# Altium PCB Adaptor_Board.PcbDoc
Units mm, origin at the board's own origin, x right, y up, seen from the top; angles counter-clockwise.
Board outline 22 x 30 mm, 4 copper layers (Top Layer, Layer 1, Layer 2, Bottom Layer), stack 0.761 mm thick; 2 components, 21 nets, 134 pads, 41 vias.
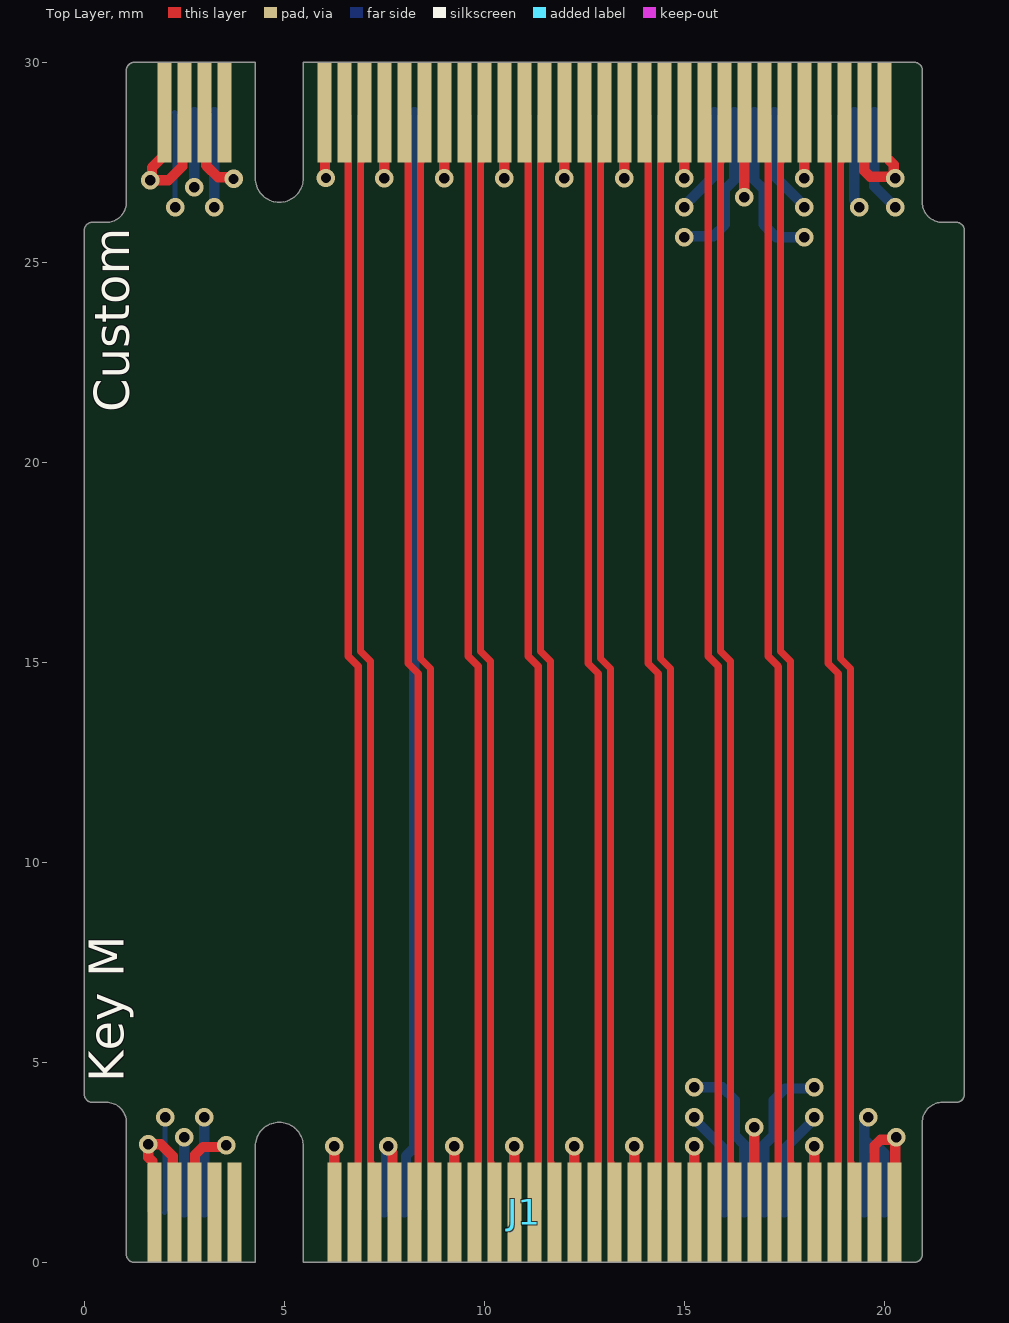
[diagram p0: Top Layer view]
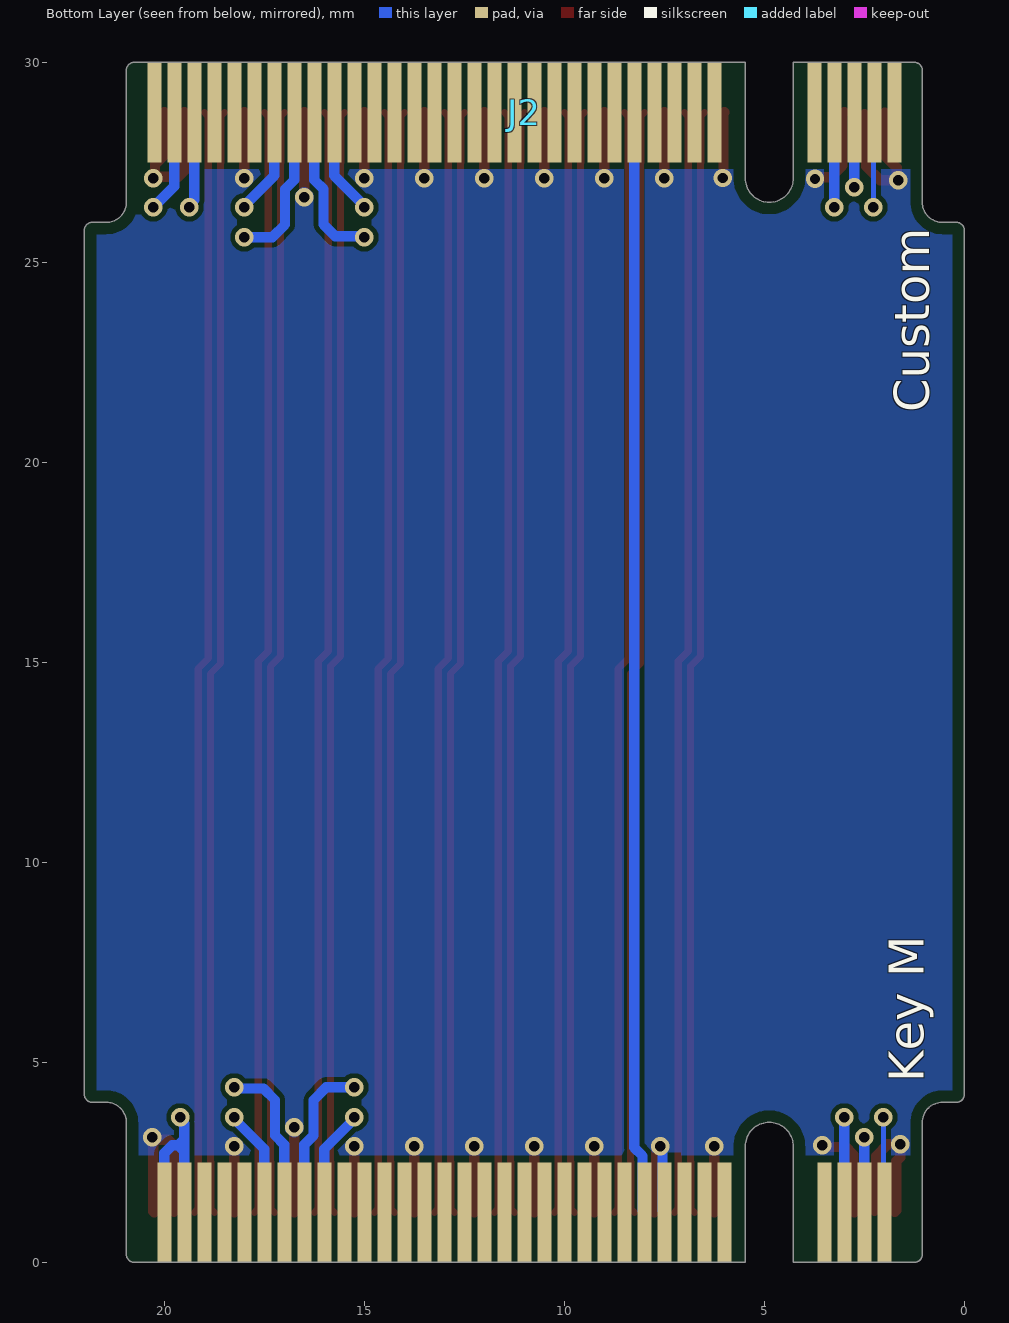
[diagram p1: Bottom Layer view, seen from below]
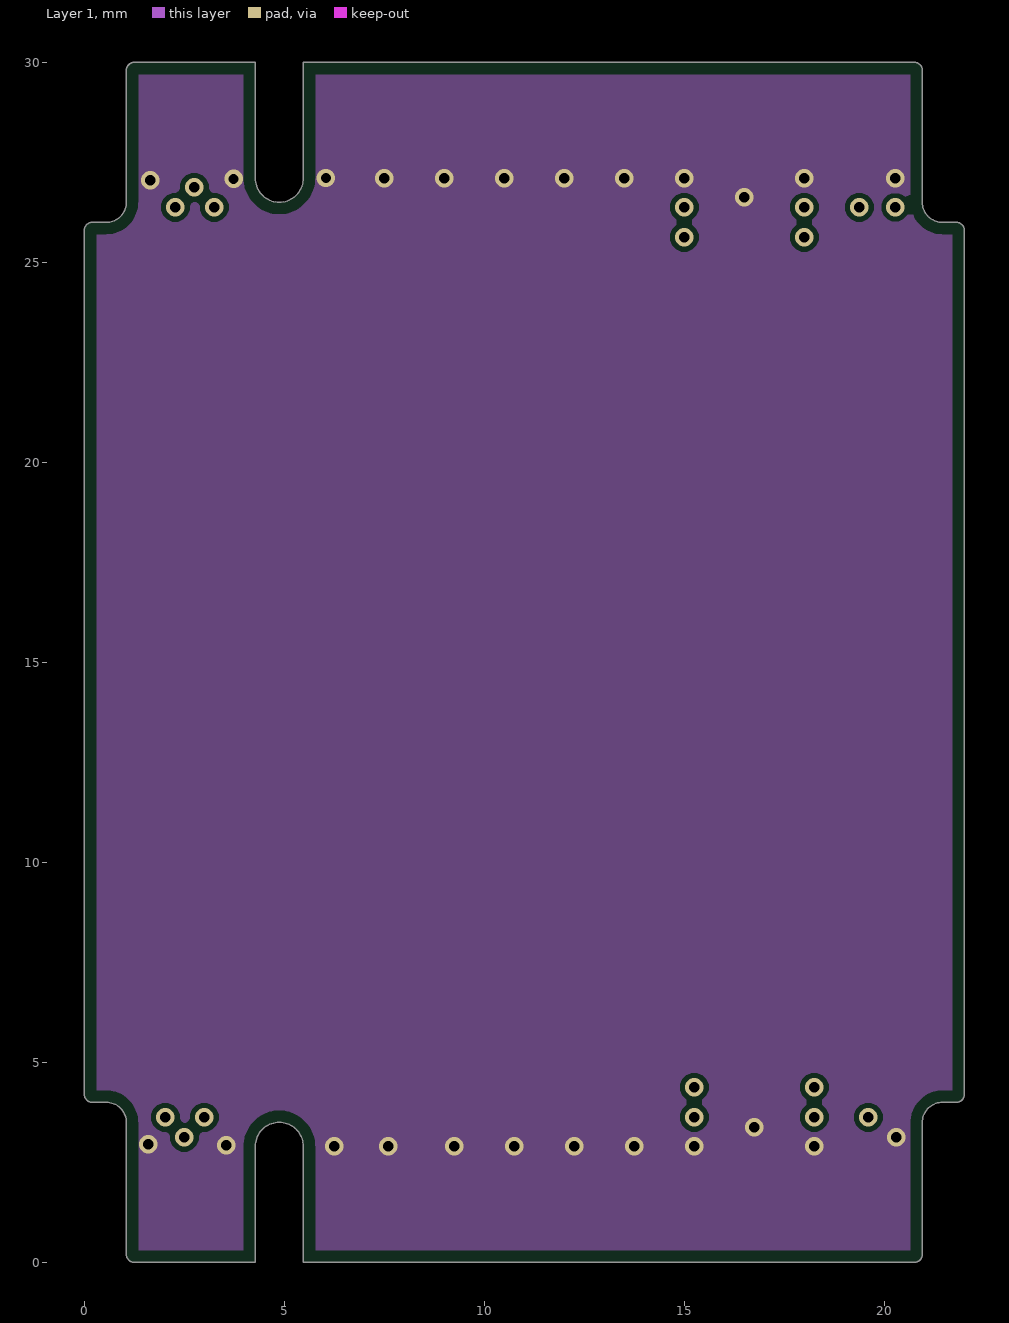
[diagram p2: Layer 1]
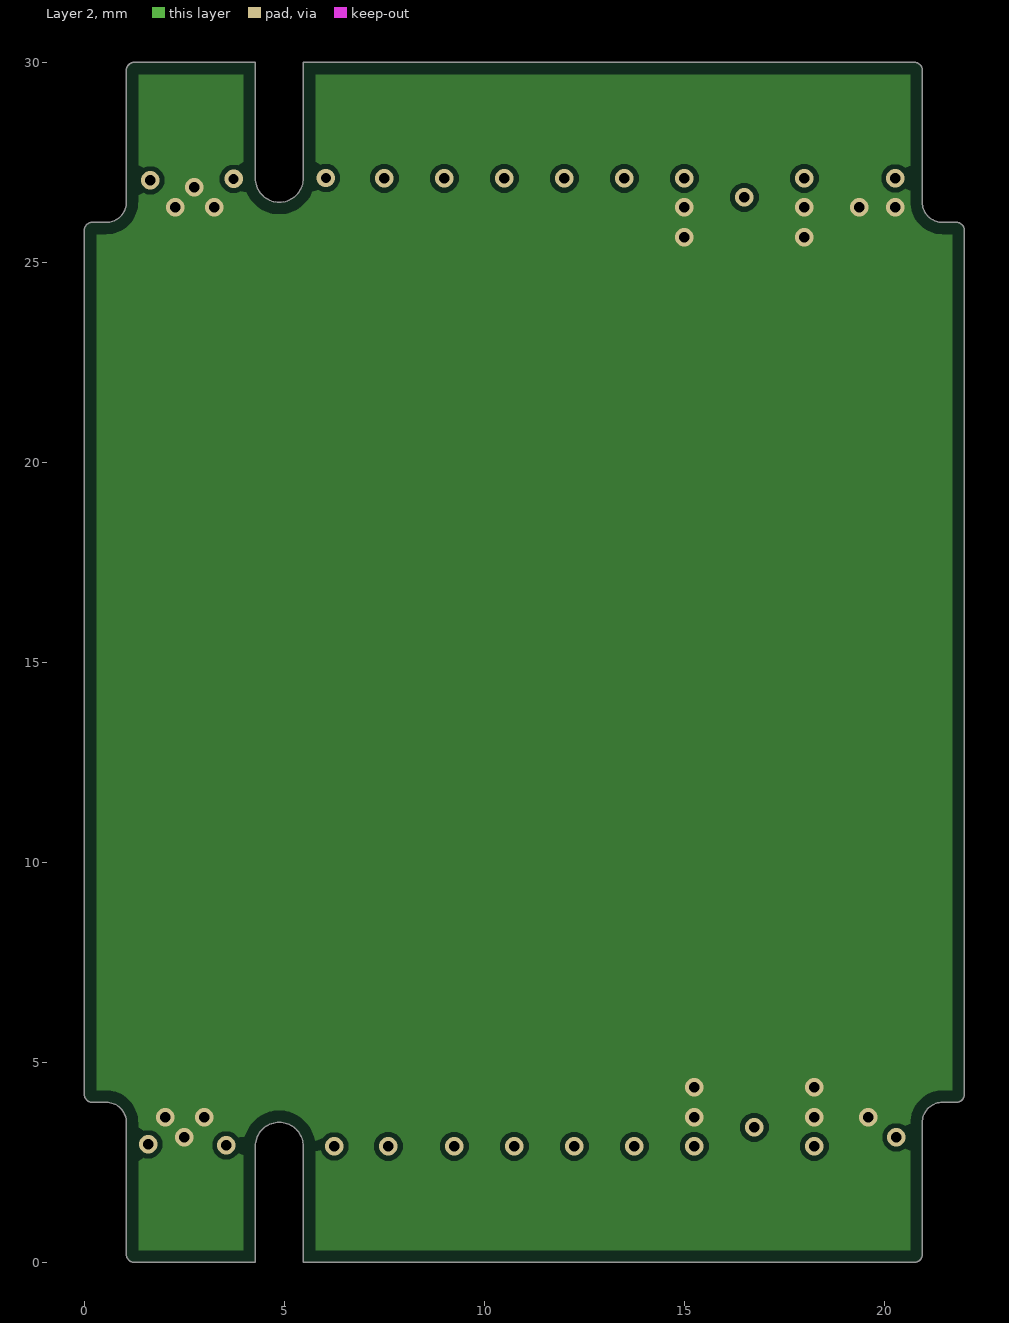
[diagram p3: Layer 2]

## Layer stack, top to bottom
Top Solder: solder mask 0.0102, Solder Resist, Dk 3.5
Top Layer: signal copper 0.0356
Dielectric 2: prepreg 0.11, PP-006, Dk 4.29
Layer 1: signal copper 0.035
Dielectric 1: dielectric 0.4, FR-4, Dk 4.8
Layer 2: signal copper 0.035
Dielectric 3: prepreg 0.11, PP-006, Dk 4.29
Bottom Layer: signal copper 0.0356
Bottom Solder: solder mask 0.0102, Solder Resist, Dk 3.5

## Board outline
0.2,4 0.55,4 cw(c0.55,3.5) 1.05,3.5 1.05,0.2 ccw(c1.25,0.2) 1.25,0 4.275,0 4.275,2.9 cw(c4.875,2.9) 4.875,3.5 cw(c4.875,2.9) 5.475,2.9 5.475,0 20.75,0 ccw(c20.75,0.2) 20.95,0.2 20.95,3.5 cw(c21.45,3.5) 21.45,4 21.8,4 ccw(c21.8,4.2) 22,4.2 22,25.8 ccw(c21.8,25.8) 21.8,26 21.45,26 cw(c21.45,26.5) 20.95,26.5 20.95,29.8 ccw(c20.75,29.8) 20.75,30 5.475,30 5.475,27.1 cw(c4.875,27.1) 4.875,26.5 cw(c4.875,27.1) 4.275,27.1 4.275,30 1.25,30 ccw(c1.25,29.8) 1.05,29.8 1.05,26.5 cw(c0.55,26.5) 0.55,26 0.2,26 ccw(c0.2,25.8) 0,25.8 0,4.2 ccw(c0.2,4.2)

## Design rules (kind name [scope] priority, off if disabled: settings)
BoardOutlineClearance [All] p1: gap=0.3 ignorepadtopadclearanceinfootprint=FALSE
Clearance Clearance_1 [All] p1: gap=0.127 ignorepadtopadclearanceinfootprint=FALSE
DiffPairsRouting [InDifferentialPairClass('PCIe')] p1: maxlimit=0.254 minlimit=0.127 mostfreqgap=0.254 toplayer_maxgap=0.127 toplayer_prefgap=0.127 toplayer_minwidth=0.176 toplayer_maxwidth=0.176 toplayer_prefwidth=0.176 bottomlayer_maxgap=0.127 bottomlayer_prefgap=0.127 bottomlayer_minwidth=0.176 bottomlayer_maxwidth=0.176 bottomlayer_prefwidth=0.176 impedanceprofiledriven=TRUE impedanceprofileid={55A645A5-C5B6-4A75-BB9C-9C2FC51129B0} impedanceprofilevalue=85.000000 maxuncoupledlength=12.7
HoleToHoleClearance [All] p1: gap=0.254 allowstackedmicrovias=FALSE
PlaneConnect [All] p1: planeconnectstyle=Direct reliefexpansion=0.508 reliefentries=4 reliefconductorwidth=0.254 reliefairgap=0.254
PolygonConnect [All] p1: thpad.connectstyle=Direct thpad.reliefconductorwidth=0.254 thpad.reliefentries=4 thpad.polygonreliefangle="90 Angle" thpad.airgapwidth=0.254 smdpad.connectstyle=Relief smdpad.reliefconductorwidth=0.254 smdpad.reliefentries=4 smdpad.polygonreliefangle="90 Angle" smdpad.airgapwidth=0.254 via.connectstyle=Direct via.reliefconductorwidth=0.254 via.reliefentries=4 via.polygonreliefangle="90 Angle" via.airgapwidth=0.254
RoutingVias [All] p1: holewidth=0.254 width=0.457 viastyle="Through Hole" minholewidth=0.254 minwidth=0.457 maxholewidth=0.254 maxwidth=0.457
SolderMaskExpansion [All] p1: expansion=0.102 istentingtop=FALSE
Width [All] p1: maxlimit=0.254 minlimit=0.127 preferedwidth=0.254
27 further rules are at their usual default settings.

## Classes and differential pairs
differential pair class PCIe: REFCLK RX0 RX1 RX2 RX3 TX0 TX1 TX2 TX3
differential pair TX3: +TX3_P -TX3_N
differential pair TX2: +TX2_P -TX2_N
differential pair TX1: +TX1_P -TX1_N
differential pair TX0: +TX0_P -TX0_N
differential pair RX3: +RX3_P -RX3_N
differential pair RX2: +RX2_P -RX2_N
differential pair RX1: +RX1_P -RX1_N
differential pair RX0: +RX0_P -RX0_N
differential pair REFCLK: +REFCLK_P -REFCLK_N

## Components (designator, comment, footprint, x,y, rotation, side; value= is the part's Value field where it differs from the comment)
J1 "M.2 Key M" "PCB EDGE M.2 Key M" 0,4.2 r0 top locked
J2 "M.2 Key M" "PCB EDGE M.2 Key M" 0,25.8 r0 bottom locked

## Footprints (in the part's own frame and the unit in brackets; to place one, negate y for a bottom-side part, rotate by r counter-clockwise, add the part's x,y. Pads: shape width x height; smd on the part's side, far side on the other; paste and mask are expansions set on the pad)
"PCB EDGE M.2 Key M" [mm]
  rect 0.35x2.5 smd mask+0.102: 1(20.25,-2.95) 3(19.75,-2.95) 5(19.25,-2.95) 7(18.75,-2.95) 9(18.25,-2.95) 11(17.75,-2.95) 13(17.25,-2.95) 15(16.75,-2.95) 17(16.25,-2.95) 19(15.75,-2.95) 21(15.25,-2.95) 23(14.75,-2.95) 25(14.25,-2.95) 27(13.75,-2.95) 29(13.25,-2.95) 31(12.75,-2.95) 33(12.25,-2.95) 35(11.75,-2.95) 37(11.25,-2.95) 39(10.75,-2.95) 41(10.25,-2.95) 43(9.75,-2.95) 45(9.25,-2.95) 47(8.75,-2.95) 49(8.25,-2.95) 51(7.75,-2.95) 53(7.25,-2.95) 55(6.75,-2.95) 57(6.25,-2.95) 67(3.75,-2.95) 69(3.25,-2.95) 71(2.75,-2.95) 73(2.25,-2.95) 75(1.75,-2.95)
  rect 0.35x2.5 smd far side mask+0.102: 2(20,-2.95) 4(19.5,-2.95) 6(19,-2.95) 8(18.5,-2.95) 10(18,-2.95) 12(17.5,-2.95) 14(17,-2.95) 16(16.5,-2.95) 18(16,-2.95) 20(15.5,-2.95) 22(15,-2.95) 24(14.5,-2.95) 26(14,-2.95) 28(13.5,-2.95) 30(13,-2.95) 32(12.5,-2.95) 34(12,-2.95) 36(11.5,-2.95) 38(11,-2.95) 40(10.5,-2.95) 42(10,-2.95) 44(9.5,-2.95) 46(9,-2.95) 48(8.5,-2.95) 50(8,-2.95) 52(7.5,-2.95) 54(7,-2.95) 56(6.5,-2.95) 58(6,-2.95) 68(3.5,-2.95) 70(3,-2.95) 72(2.5,-2.95) 74(2,-2.95)

## Via types
v1: diameter 0.457, hole 0.254, Top Layer to Bottom Layer, tented both sides, 41 vias

## Nets (pads, with @x,y where several pads share a name; then routed paths per layer and width w, separated by ;. In a path a pad name is that pad's centre, name@x,y a point inside that pad or via, vN(x,y) a via of type N, cw(c..) or ccw(c..) an arc to the next point about the centre after c; other vN are vias at no path point)
+3V3: J1.2 J1.4 J1.12 J1.14 J1.16 J1.18 J1.70 J1.72 J1.74 J2.3 J2.5 J2.13 J2.15 J2.17 J2.19 J2.69 J2.71 J2.73 | length 50.3
  Bottom Layer w0.127: J1.74 2.019,1.269 2.019,3.619 v1(2.025,3.625) ; J2.73 2.269,28.731 2.269,26.381 v1(2.275,26.375)
  Bottom Layer w0.254: J1.72 v1(2.5,3.125) ; v1(2.75,26.875) J2.71 ; J1.70 v1(3,3.625) ; v1(3.25,26.375) J2.69 ; v1(15,25.625) 15.027,25.652 15.727,25.652 16.017,25.943 16.017,26.825 16.25,27.057 J2.17 ; v1(15,26.375) 15,26.418 15.75,27.168 J2.19 ; v1(15.25,3.625) 15.25,3.582 16,2.832 J1.18 ; v1(15.25,4.375) 15.95,4.375 16.267,4.058 16.267,3.175 16.5,2.943 J1.16 ; J2.15 16.75,27.057 16.982,26.825 16.982,25.943 17.3,25.625 v1(18,25.625) ; J1.14 17,2.943 17.233,3.175 17.233,4.058 17.523,4.348 18.223,4.348 v1(18.25,4.375) ; J2.13 17.25,27.168 18,26.418 v1(18,26.375) ; J1.12 17.5,2.832 18.25,3.582 v1(18.25,3.625) ; J2.5 19.25,26.555 19.375,26.43 v1(19.375,26.375) ; J1.4 19.5,2.775 ; 19.5,3.198 19.5,3.075 ; v1(19.6,3.625) 19.6,3.57 19.5,3.47 19.5,3.075 ; J2.3 19.75,26.9 v1(20.275,26.375) ; J1.2 20,2.725 19.8,2.925 19.65,2.925 ; 19.5,2.775 19.5,2.925 ; 19.5,2.775 19.65,2.925 ; 19.5,2.925 19.5,3.075 ; 19.5,2.925 19.65,2.925 ; 19.5,3.075 19.65,2.925
GND: J1.1 J1.3 J1.9 J1.15 J1.21 J1.27 J1.33 J1.39 J1.45 J1.51 J1.52 J1.57 J1.71 J1.73 J1.75 J2.2 J2.4 J2.10 J2.16 J2.22 J2.28 J2.34 J2.40 J2.46 J2.52 J2.58 J2.70 J2.72 J2.74 | length 54.2
  Top Layer w0.254: v1(1.65,27.05) 2.105,27.05 2.452,27.396 2.452,28.671 J2.72@2.493,28.712 ; J1.75@1.737,1.262 1.702,1.298 1.702,2.525 1.6,2.627 v1(1.6,2.95) 1.912,2.95 2.21,2.652 2.21,1.321 J1.73@2.243,1.288 ; v1@1.744,27.05 1.689,27.105 1.689,27.364 1.987,27.662 J2.74@1.987,28.738 ; J1.71 2.768,1.268 2.768,2.687 2.967,2.886 3.511,2.886 v1(3.55,2.925) ; J2.70 3.048,28.702 3.048,27.418 3.341,27.125 3.694,27.125 v1(3.733,27.086) ; J2.58 6.019,28.731 6.019,27.126 v1(6.039,27.107) ; J1.57 v1(6.25,2.9) ; v1(7.5,27.1) J2.52 ; v1(7.6,2.9) 7.6,2.845 7.702,2.743 7.702,1.298 J1.51 ; v1(9,27.1) J2.46 ; J1.45 v1(9.25,2.9) ; v1(10.5,27.1) J2.40 ; J1.39 v1(10.75,2.9) ; v1(12,27.1) J2.34 ; J1.33 v1(12.25,2.9) ; v1(13.5,27.1) J2.28 ; J1.27 v1(13.75,2.9) ; v1(15,27.1) J2.22 ; J1.21 v1(15.25,2.9) ; v1(16.5,26.625) J2.16 ; J1.15 v1(16.75,3.375) ; v1(18,27.1) J2.10 ; J1.9 v1(18.25,2.9) ; J2.4 19.5,27.288 19.649,27.139 v1@20.236,27.139 ; J1.3@19.755,1.255 19.755,2.915 19.903,3.064 20.184,3.064 20.245,3.125 v1(20.3,3.125) 20.275,3.1 20.275,2.325 20.275,1.275 J1.1 J1.1@20.25,2.325 ; J2.2 20,27.675 20.236,27.439 v1@20.236,27.139 ; v1(20.275,27.1) v1@20.236,27.139
  Bottom Layer w0.254: J1.52 7.548,1.298 7.548,2.793 7.6,2.845 v1(7.6,2.9)
PERST#: J1.50 J2.49 | length 27.6
  Bottom Layer w0.254: J1.50 8.044,1.294 8.044,2.662 8.25,2.868 J2.49
REFCLK_N: J1.53 J2.54 | length 27.7
  Top Layer w0.176: J2.54 6.913,28.663 6.913,27.496 6.902,27.485 6.902,15.277 7.152,15.027 7.152,2.515 7.163,2.504 7.163,1.337 J1.53
REFCLK_P: J1.55 J2.56 | length 27.7
  Top Layer w0.176: J2.56 6.587,28.663 6.587,27.496 6.598,27.485 6.598,15.151 6.848,14.901 6.848,2.515 6.837,2.504 6.837,1.337 J1.55
RX0_N: J1.47 J2.48 | length 27.7
  Top Layer w0.176: J2.48 8.413,28.663 8.413,27.496 8.402,27.485 8.402,15.099 8.652,14.849 8.652,2.515 8.663,2.504 8.663,1.337 J1.47
RX0_P: J1.49 J2.50 | length 27.7
  Top Layer w0.176: J2.50 8.087,28.663 8.087,27.496 8.098,27.485 8.098,14.973 8.348,14.723 8.348,2.515 8.337,2.504 8.337,1.337 J1.49
RX1_N: J1.35 J2.36 | length 27.7
  Top Layer w0.176: J2.36 11.413,28.663 11.413,27.496 11.402,27.485 11.402,15.277 11.652,15.027 11.652,2.515 11.663,2.504 11.663,1.337 J1.35
RX1_P: J1.37 J2.38 | length 27.7
  Top Layer w0.176: J2.38 11.087,28.663 11.087,27.496 11.098,27.485 11.098,15.151 11.348,14.901 11.348,2.515 11.337,2.504 11.337,1.337 J1.37
RX2_N: J1.23 J2.24 | length 27.7
  Top Layer w0.176: J2.24 14.413,28.663 14.413,27.496 14.402,27.485 14.402,15.099 14.652,14.849 14.652,2.515 14.663,2.504 14.663,1.337 J1.23
RX2_P: J1.25 J2.26 | length 27.7
  Top Layer w0.176: J2.26 14.087,28.663 14.087,27.496 14.098,27.485 14.098,14.973 14.348,14.723 14.348,2.515 14.337,2.504 14.337,1.337 J1.25
RX3_N: J1.11 J2.12 | length 27.7
  Top Layer w0.176: J2.12 17.413,28.663 17.413,27.496 17.402,27.485 17.402,15.277 17.652,15.027 17.652,2.515 17.663,2.504 17.663,1.337 J1.11
RX3_P: J1.13 J2.14 | length 27.7
  Top Layer w0.176: J2.14 17.087,28.663 17.087,27.496 17.098,27.485 17.098,15.151 17.348,14.901 17.348,2.515 17.337,2.504 17.337,1.337 J1.13
TX0_N: J1.41 J2.42 | length 27.7
  Top Layer w0.176: J2.42 9.913,28.663 9.913,27.496 9.902,27.485 9.902,15.277 10.152,15.027 10.152,2.515 10.163,2.504 10.163,1.337 J1.41
TX0_P: J1.43 J2.44 | length 27.7
  Top Layer w0.176: J2.44 9.587,28.663 9.587,27.496 9.598,27.485 9.598,15.151 9.848,14.901 9.848,2.515 9.837,2.504 9.837,1.337 J1.43
TX1_N: J1.29 J2.30 | length 27.7
  Top Layer w0.176: J2.30 12.913,28.663 12.913,27.496 12.902,27.485 12.902,15.099 13.152,14.849 13.152,2.515 13.163,2.504 13.163,1.337 J1.29
TX1_P: J1.31 J2.32 | length 27.7
  Top Layer w0.176: J2.32 12.587,28.663 12.587,27.496 12.598,27.485 12.598,14.973 12.848,14.723 12.848,2.515 12.837,2.504 12.837,1.337 J1.31
TX2_N: J1.17 J2.18 | length 27.7
  Top Layer w0.176: J2.18 15.913,28.663 15.913,27.496 15.902,27.485 15.902,15.277 16.152,15.027 16.152,2.515 16.163,2.504 16.163,1.337 J1.17
TX2_P: J1.19 J2.20 | length 27.7
  Top Layer w0.176: J2.20 15.587,28.663 15.587,27.496 15.598,27.485 15.598,15.151 15.848,14.901 15.848,2.515 15.837,2.504 15.837,1.337 J1.19
TX3_N: J1.5 J2.6 | length 27.7
  Top Layer w0.176: J2.6 18.913,28.663 18.913,27.496 18.902,27.485 18.902,15.099 19.152,14.849 19.152,2.515 19.163,2.504 19.163,1.337 J1.5
TX3_P: J1.7 J2.8 | length 27.7
  Top Layer w0.176: J2.8 18.587,28.663 18.587,27.496 18.598,27.485 18.598,14.973 18.848,14.723 18.848,2.515 18.837,2.504 18.837,1.337 J1.7
pads on no net: J1.6 J1.8 J1.10 J1.20 J1.22 J1.24 J1.26 J1.28 J1.30 J1.32 J1.34 J1.36 J1.38 J1.40 J1.42 J1.44 J1.46 J1.48 J1.54 J1.56 J1.58 J1.67 J1.68 J1.69 J2.1 J2.7 J2.9 J2.11 J2.21 J2.23 J2.25 J2.27 J2.29 J2.31 J2.33 J2.35 J2.37 J2.39 J2.41 J2.43 J2.45 J2.47 J2.51 J2.53 J2.55 J2.57 J2.67 J2.68 J2.75

## Polygon pours and split planes (outlines as drawn)
+3V3 on Layer 2 "+3V3_L01" (solid, remove dead copper, pour order 1): 0,0 0,30 22,30 22,0
GND on Bottom Layer "GND_L01" (solid, remove dead copper, pour order 3): 0,2.675 0,27.325 22,27.325 22,2.675
GND on Layer 1 "GND_L01" (solid, remove dead copper, pour order 0): 0,0 0,30 22,30 22,0

## Silkscreen, mask and mechanical layers (free items; w line width, h text height)
Top Overlay:
  text "Custom" at 1.409,21.25 h1.5 r90
  text "Key M" at 1.279,4.5 h1.5 r90
Bottom Overlay:
  text "Custom" at 0.591,21.25 h1.5 r270
  text "Key M" at 0.721,4.5 h1.5 r270
Mechanical 1:
  lines w0.05: 0,4.2 0,25.8 ; 22,4.2 22,25.8